# Altium PCB Master_PCB1.PcbDoc
Units mil, origin at the board's own origin, x right, y up, seen from the top; angles counter-clockwise.
Board outline 3105 x 1150 mil, 2 copper layers (Top Layer, Bottom Layer); 27 components, 20 nets, 72 pads, 12 vias.
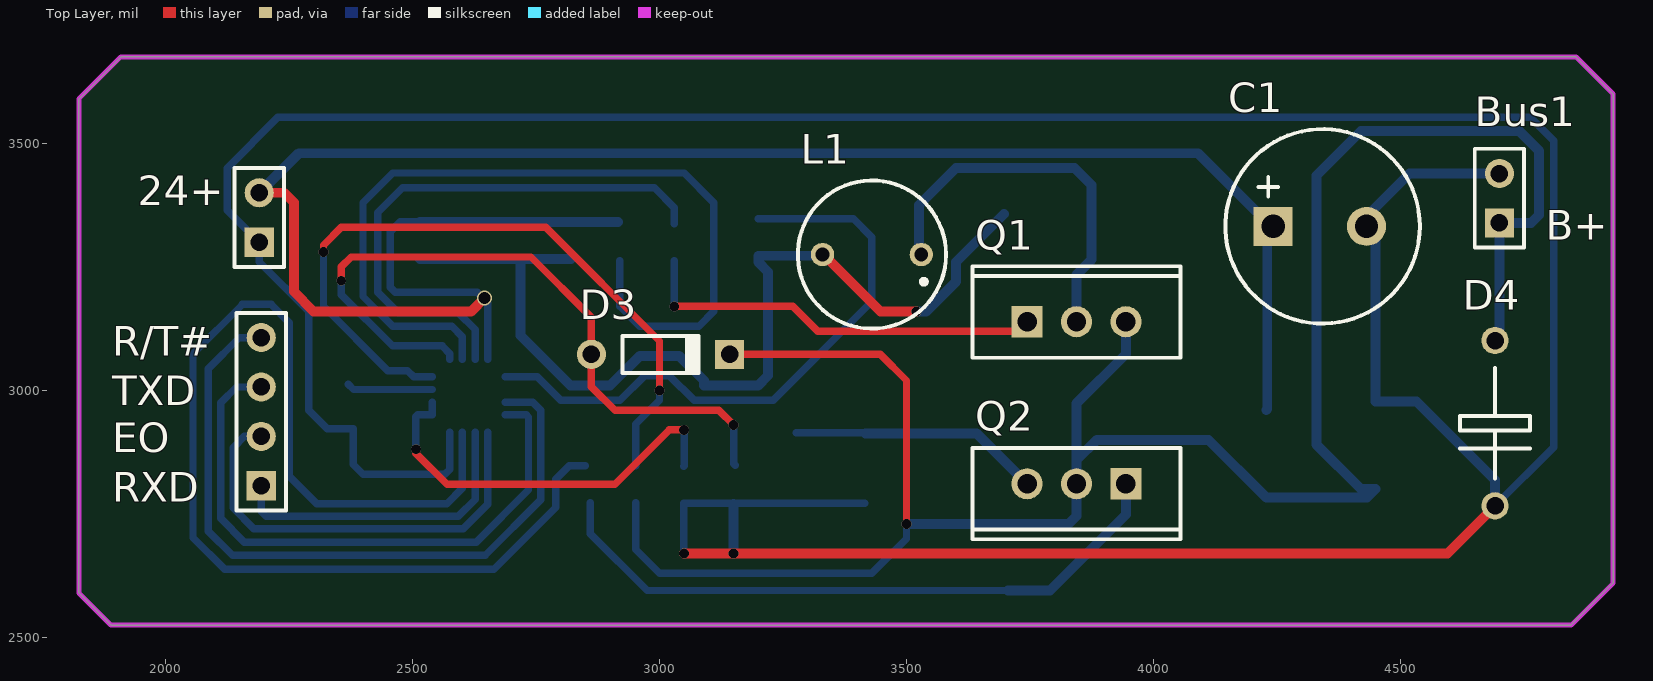
[diagram p0: Top Layer view]
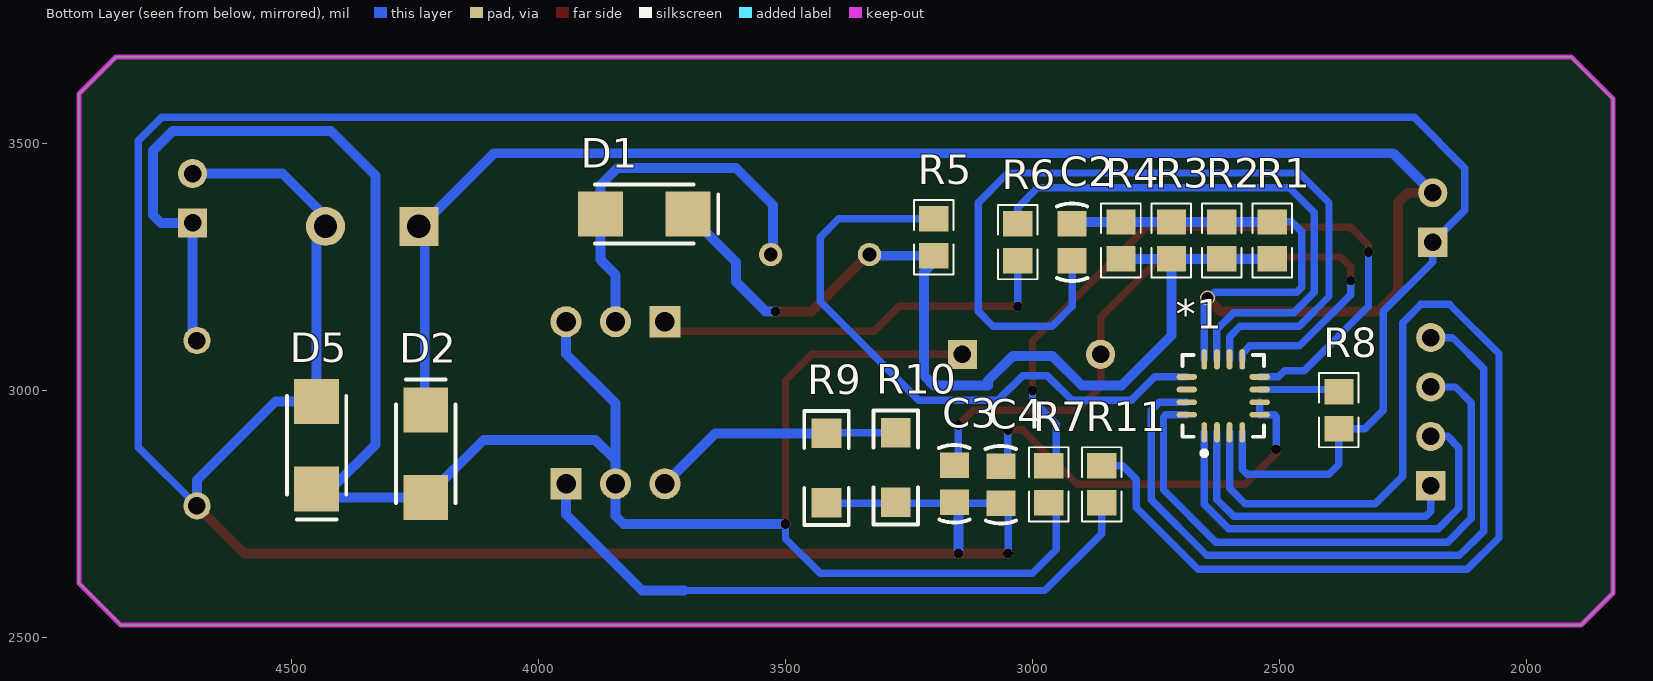
[diagram p1: Bottom Layer view, seen from below]

## Layer stack, top to bottom
Top Solder: solder mask 0.4, Solder Resist, Dk 3.5
Top Layer: signal copper 1.4
Dielectric 1: dielectric 12.6, FR-4, Dk 4.8
Bottom Layer: signal copper 1.4
Bottom Solder: solder mask 0.4, Solder Resist, Dk 3.5

## Board outline
1890,2525 1825,2590 1825,3590 1910,3675 4855,3675 4930,3600 4930,2610 4845,2525

## Design rules (kind name [scope] priority, off if disabled: settings)
Clearance [All] p1: gap=10
PolygonConnect [All] p1: connectstyle=Relief reliefconductorwidth=10 reliefentries=4 polygonreliefangle="90 Angle" airgapwidth=10
RoutingVias [All] p1: holewidth=28 width=50 viastyle="Through Hole" minholewidth=28 minwidth=50 maxholewidth=28 maxwidth=50
SolderMaskExpansion [All] p1: expansion=4
Width [All] p1: maxlimit=100 minlimit=10 preferedwidth=20
30 further rules are at their usual default settings.

## Components (designator, comment, footprint, x,y, rotation, side; value= is the part's Value field where it differs from the comment)
24+ "Header 2" HDR1X2 2190,3300 r90 top (schematic designator POWER1)
*1 "CMT100" QFN-16 2614,2989 r90 bottom
Bus1 "Header 2" HDR1X2 4700,3339 r90 top
C1 "Cap Pol" C-RB-10 4242,3332 r0 top
C2 "Cap" C-RAD-0805 2920,3300 r90 bottom
C3 "Cap" C-RAD-0805 3158,2811 r270 bottom
C4 "Cap" C-RAD-0805 3064.01,2809 r270 bottom
Ctrl1 "Header 4" HDR1X4 2194,2807 r90 top
D1 "SS34B" DIODE-SMA 3786,3357 r180 bottom
D2 "SS18" DIODE-SMA 4228,2872 r90 bottom
D3 "LL4148" DO-35 3002,3073 r0 top
D4 "P6KE30A" DO-15 4691,3101 r270 top
D5 "SS18" DIODE-SMA 4449,2889 r270 bottom
L1 "Inductor" L-RB-8 3530,3275 r180 top
Q1 "RSJ250P10" TO-220AB 3844,3139 r0 top
Q2 "BUK98180" TO-220AB 3844,2811 r180 top
R1 "Res1" 0805-1 2515.02,3303.6 r90 bottom
R2 "Res1" 0805-1 2617.01,3303.6 r90 bottom
R3 "Res1" 0805-1 2719.01,3303.6 r90 bottom
R4 "Res1" 0805-1 2821,3303.6 r90 bottom
R5 "Res1" 0805-1 3200,3310 r270 bottom
R6 "Res1" 0805-1 3030,3300 r270 bottom
R7 "Res1" 0805-1 2966.99,2810 r270 bottom
R8 "Res1" 0805-1 2380,2960 r270 bottom
R9 "Res1" 1206 3417,2843 r90 bottom
R10 "Res1" 1206 3277,2844 r90 bottom
R11 "Res1" 0805-1 2860,2810 r270 bottom

## Footprints (in the part's own frame and the unit in brackets; to place one, negate y for a bottom-side part, rotate by r counter-clockwise, add the part's x,y. Pads: shape width x height; smd on the part's side, far side on the other; paste and mask are expansions set on the pad)
0805-1 [mm] "贴片带丝印"
  rect 1.3x1.5 smd: 1(-0.95,0) 2(0.95,0)
  silkscreen extent -1.91,-1.02 1.91,1.02, body extent -1.14,-0.51 1.14,0.51, height 1
1206 [mil] "贴片元件"
  rect 60x60 smd: 1(-70,0) 2(70,0)
  silkscreen extent -115,-45 115,45, body extent -75,-35 75,35, height 39
C-RAD-0805 [mm] "贴片电容"
  rect 1.3x1.5 smd: 1(-0.95,0) 2(0.95,0)
  silkscreen extent -2,-0.79 2,0.79, body extent -1.27,-0.64 1.27,0.64, height 0.9
C-RB-10 [mm] "35V470uF电容"
  rect 2x2 hole 1.2: 1(0,0)
  round 2 hole 1.2: 2(4.8,0)
  silkscreen extent -2.46,-5 7.54,5
DIODE-SMA [mm] "贴片二极管"
  rect 2.3x2.3 smd: 1(-2.25,0) 2(2.25,0)
  silkscreen extent -2.54,-1.52 3.81,1.52, body extent -2.92,-1.4 2.92,1.4, height 3
DO-15 [mm]
  round 1.4 hole 0.9: 1(0,0) 2(8.5,0)
  silkscreen extent 1.4,-1.8 7.1,1.8
DO-35 [mm] "Diode, Axial; Body 3.8 x 1.9 mm (LxDia. max), Lead Dia. 0.53 mm (max)"
  round 1.5 hole 0.9: 1(-3.55,0)
  rect 1.5x1.5 hole 0.9: 2(3.55,0)
  silkscreen extent -1.95,-0.95 2.05,0.95
HDR1X2 [mm] "Connector; Header; 2 Position"
  rect 1.5x1.5 hole 0.9: 1(0,0)
  round 1.5 hole 0.9: 2(2.54,0)
  silkscreen extent -1.27,-1.27 3.81,1.27
HDR1X4 [mm] "Connector; Header; 4 Position"
  rect 1.5x1.5 hole 0.9: 1(0,0)
  round 1.5 hole 0.9: 2(2.54,0) 3(5.08,0) 4(7.62,0)
  silkscreen extent -1.27,-1.27 8.89,1.27
L-RB-8 [mm] "Inductor"
  round 1.2 hole 0.7: 1(0,0) 2(5.08,0)
  silkscreen extent -1.27,-3.81 6.35,3.81
QFN-16 [mm] "QFN"
  oval 1.05x0.3 smd: 1(-1.875,0.975) 2(-1.875,0.325) 3(-1.875,-0.325) 4(-1.875,-0.975) 9(1.875,-0.975) 10(1.875,-0.325) 11(1.875,0.325) 12(1.875,0.975)
  oval 0.3x1.05 smd: 5(-0.975,-1.875) 6(-0.325,-1.875) 7(0.325,-1.875) 8(0.975,-1.875) 13(0.975,1.875) 14(0.325,1.875) 15(-0.325,1.875) 16(-0.975,1.875)
  silkscreen extent -3.07,-2.1 2.1,2.1, body extent -2.07,-2.07 2.07,2.07, height 0.8
TO-220AB [mm] "TO, Thru-Hole, Vertical, Heatsink Mounted; 3 In-Line Leads; Pitch 2.54 mm"
  round 1.6 hole 1: D(0,0) S(2.54,0)
  rect 1.6x1.6 hole 1: G(-2.54,0)
  silkscreen extent -5.35,-1.85 5.35,2.85, body extent -5.33,-1.78 5.33,2.79, height 4

## Part data
24+ Bus1: "Header, 2-Pin"
*1: "主机"
C1: "极性电解电容"
C2 C3 C4: "无极性电容"
Ctrl1: "Header, 4-Pin"
D1 D2 D3 D5: library part Diode, "Default Diode"
D4: library part "Diode 18TQ045", "Schottky Rectifier"
L1: "电感"
Q1: library part MOSFET-P, "P-Channel MOSFET"
Q2: library part MOSFET-N, "N-Channel MOSFET"
R1 R2 R3 R4 R5 R6 R7 R8 R9 R10 R11: "贴片电阻"

## Via types
v1: diameter 20, hole 20, Top Layer to Bottom Layer, 11 vias
v2: diameter 30, hole 25, Top Layer to Bottom Layer, 1 vias

## Nets (pads, with @x,y where several pads share a name; then routed paths per layer and width w, separated by ;. In a path a pad name is that pad's centre, name@x,y a point inside that pad or via, vN(x,y) a via of type N, cw(c..) or ccw(c..) an arc to the next point about the centre after c; other vN are vias at no path point)
5V: *1.5 *1.6 C4.1 | length 822.9
  Top Layer w15: v1(2507,2881) 2507,2873 2570,2810 2910,2810 3020,2920 v1(3050,2920)
  Bottom Layer w15: v1(2507,2881) 2507,2947 2510.61,2950.61 *1.5 *1.6 ; C4.1@3049.01,2846.4 3050,2847.39 v1(3050,2920)
24V: 24+.2 *1.12 C1.1 C2.2 D2.2 R1.2 R2.2 R3.2 R4.2 | length 4090.3
  Top Layer w20: 24+.2 2240,3400 2260,3380 2260,3200 2300,3160 2619,3160 v2(2646,3187)
  Bottom Layer w15: R1.2 2475,3341 2455,3321 2455,3209 2465,3199 2631,3199 2652.39,3177.61 *1.12
  Bottom Layer w20: 24+.2 2270,3480 4090,3480 4230,3340 4230,2962.58 D2.2 ; R1.2 R2.2 R3.2 R4.2 C2.2@2916.4,3341
BUS+: Bus1.1 D2.1 D3.2 D4.1 D5.2 Q1.S Q2.D R7.2 | length 4524.3
  Top Layer w15: D3.2 3447,3073 3500,3020 v1(3500,2730)
  Bottom Layer w15: R7.2@2951.99,2772.6 2951.99,2678.01 3000,2630 3430,2630 3500,2700 v1(3500,2730)
  Bottom Layer w20: v1(3500,2730) 3828,2730 3844,2746 Q2.D 3844,2859 ; Q1.S@3944,3146 3944,3074 3844,2974 3844,2859 ; D4.1 4700,3110 Bus1.1 4764,3339 4780,3355 4780,3485 4740,3525 4420,3525 4330,3435 4330,2890 4419.58,2800.42 D5.2 4432,2783.42 D2.1 4111.42,2900 3885,2900 3844,2859
BUS-: 24+.1 *1.4 Bus1.2 C1.2 C3.2 C4.2 D4.2 D5.1 R8.2 R9.1 R10.1 | length 7861.1
  Top Layer w20: v1(3050,2670) v1(3150,2670) 4594.65,2670 D4.2
  Bottom Layer w15: *1.4 2575.61,2840 2565.61,2830 2400,2830 2380,2850 R8.2 2327.4,2922.6 2290,2960 2290,3160 2190,3260 24+.1 2125,3365 2125,3450 2227.5,3552.5 4762.5,3552.5 4810,3505 4810,2885.35 D4.2 ; v1@3049.01,2670.99 3049.01,2771.6 3149,2771.6 C3.2@3150,2770.6 ; C3.2@3150,2771.6 R9.1@3415.6,2771.6
  Bottom Layer w20: v1(3150,2670) C3.2@3150,2770.6 ; D4.2 4691,2819 4532.42,2977.58 D5.1 4449,3309.98 4418.98,3340 4517.98,3439 Bus1.2
Net*1_1: *1.1 Ctrl1.2 | length 887.6
  Bottom Layer w15: Ctrl1.2 2160,2907 2137,2884 2137,2762 2179,2720 2603,2720 2652.39,2769.39 *1.1
Net*1_2: *1.2 Ctrl1.1 | length 639.1
  Bottom Layer w15: Ctrl1.1 2194,2755 2204,2745 2592.64,2745 2626.8,2779.15 *1.2
Net*1_3: *1.3 R11.1 | length 2374.3
  Bottom Layer w15: *1.3 2601.2,2802.2 2570,2771 2306,2771 2251,2826 2251,3137 2214,3174 2156,3174 2056,3074 2056,2702 2120,2638 2665,2638 2790,2763 2790,2820 2817.4,2847.4 R11.1@2850,2847.4
Net*1_7: *1.7 R8.1 | length 174.7
  Bottom Layer w15: R8.1@2370,3012.6 2380.8,3001.8 *1.7
Net*1_8: *1.8 R7.1 | length 1465.9
  Top Layer w15: v1(2320,3280) 2320,3294 2356,3330 2770,3330 3000,3100 v1(3000,3000)
  Bottom Layer w15: v1(2320,3280) 2320,3170 2450,3040 2490,3040 2502.61,3027.39 *1.8 ; R7.1@2951.99,2847.4 2951.99,2931.99 3000,2980 v1(3000,3000)
Net*1_9: *1.9 C3.1 D3.1 | length 1444.7
  Top Layer w15: v1(2356,3222) 2356,3250 2376,3270 2740,3270 2862.24,3147.76 D3.1 2862.24,3007.76 2910,2960 3120,2960 v1(3150,2930)
  Bottom Layer w15: v1(2356,3222) 2356,3194 2460,3090 2560,3090 2575.61,3074.39 *1.9 ; v1(3150,2930) 3150,2851.4 C3.1@3153,2848.4
Net*1_10: *1.10 C2.1 | length 1762.1
  Bottom Layer w15: *1.10 2601.2,3108.8 2580,3130 2460,3130 2400,3190 2400,3380 2460,3440 3050,3440 3110,3380 3110,3160 3080,3130 2960,3130 2920,3170 C2.1
Net*1_11: *1.11 R6.1 | length 1119.7
  Bottom Layer w15: *1.11 2626.8,3123.2 2593,3157 2471.64,3157 2430,3198.64 2430,3360 2480,3410 2990,3410 3030,3370 R6.1
Net*1_13: *1.13 R5.1 | length 1261.6
  Bottom Layer w15: *1.13 2752.61,3027.39 2800,2980 2920,2980 2970,3030 3020,3030 3070,2980 3230,2980 3430,3180 3430,3310 3392.6,3347.4 R5.1
Net*1_15: *1.15 Ctrl1.4 | length 1462.1
  Bottom Layer w15: Ctrl1.4 2150,3107 2087,3044 2087,2715 2136,2666 2647,2666 2760,2779 2760,2960 2743.8,2976.2 *1.15
Net*1_16: *1.16 Ctrl1.3 | length 1212.3
  Bottom Layer w15: Ctrl1.3 2144,3007 2112,2975 2112,2741 2160,2693 2629,2693 2735,2799 2735,2946.2 2730.59,2950.61 *1.16
NetD1_1: D1.1 L1.1 Q1.D | length 770.1
  Bottom Layer w20: L1.1@3525,3282 3525,3375 3600,3450 3840,3450 3874.58,3415.42 D1.1 3874.58,3264.58 3844,3234 Q1.D@3844,3146
NetD1_2: D1.2 L1.2 R1.1 R2.1 R3.1 R4.1 R5.2 | length 1975.4
  Top Layer w20: L1.2@3325,3282 3447,3160 v1(3520,3160)
  Bottom Layer w20: R1.1 R2.1 R3.1 ; R4.1 R3.1 ; L1.2@3325,3282 3315.6,3272.6 R5.2 3200,3260 3220,3240 3220,3030 3200,3010 3090,3010 3090,3020 3040,3070 2960,3070 2900,3010 2820,3010 2719.01,3110.99 R3.1 ; v1(3520,3160) 3540,3160 3600,3220 3600,3259.58 D1.2
NetQ1_G: Q1.G R6.2 | length 838.1
  Top Layer w15: v1(3030,3170) 3270,3170 3320,3120 3718,3120 Q1.G@3744,3146
  Bottom Layer w15: v1(3030,3170) R6.2
NetQ2_G: Q2.G R11.2 | length 1320
  Bottom Layer w15: R11.2 2860,2710 2975,2595 3705,2595
  Bottom Layer w20: 3705,2595 3790,2595 3944,2749 Q2.G
NetQ2_S: Q2.S R9.2 R10.2 | length 508.2
  Bottom Layer w15: R10.2 R9.2@3416,2914
  Bottom Layer w20: R9.2 3642,2913 Q2.S
pads on no net: *1.14

## Keep-outs
Keep-Out Layer:
  the board outline again, w10

## Silkscreen, mask and mechanical layers (free items; w line width, h text height)
Top Overlay:
  text "B+" at 4794,3305 h60
  text "R/T#" at 1893,3070 h60
  text "TXD" at 1893,2970 h60
  text "EO" at 1893,2875 h60
  text "RXD" at 1893,2775 h60